# Altium PCB LightingDriver.PcbDoc (part 1 of 2)
Units mm, origin at the board's own origin, x right, y up, seen from the top; angles counter-clockwise.
Board outline 100 x 95 mm, 2 copper layers (Top Layer, Bottom Layer), stack 1.621 mm thick; 95 components, 49 nets, 284 pads, 147 vias.
Unrouted connection lines stored in the file: 4.
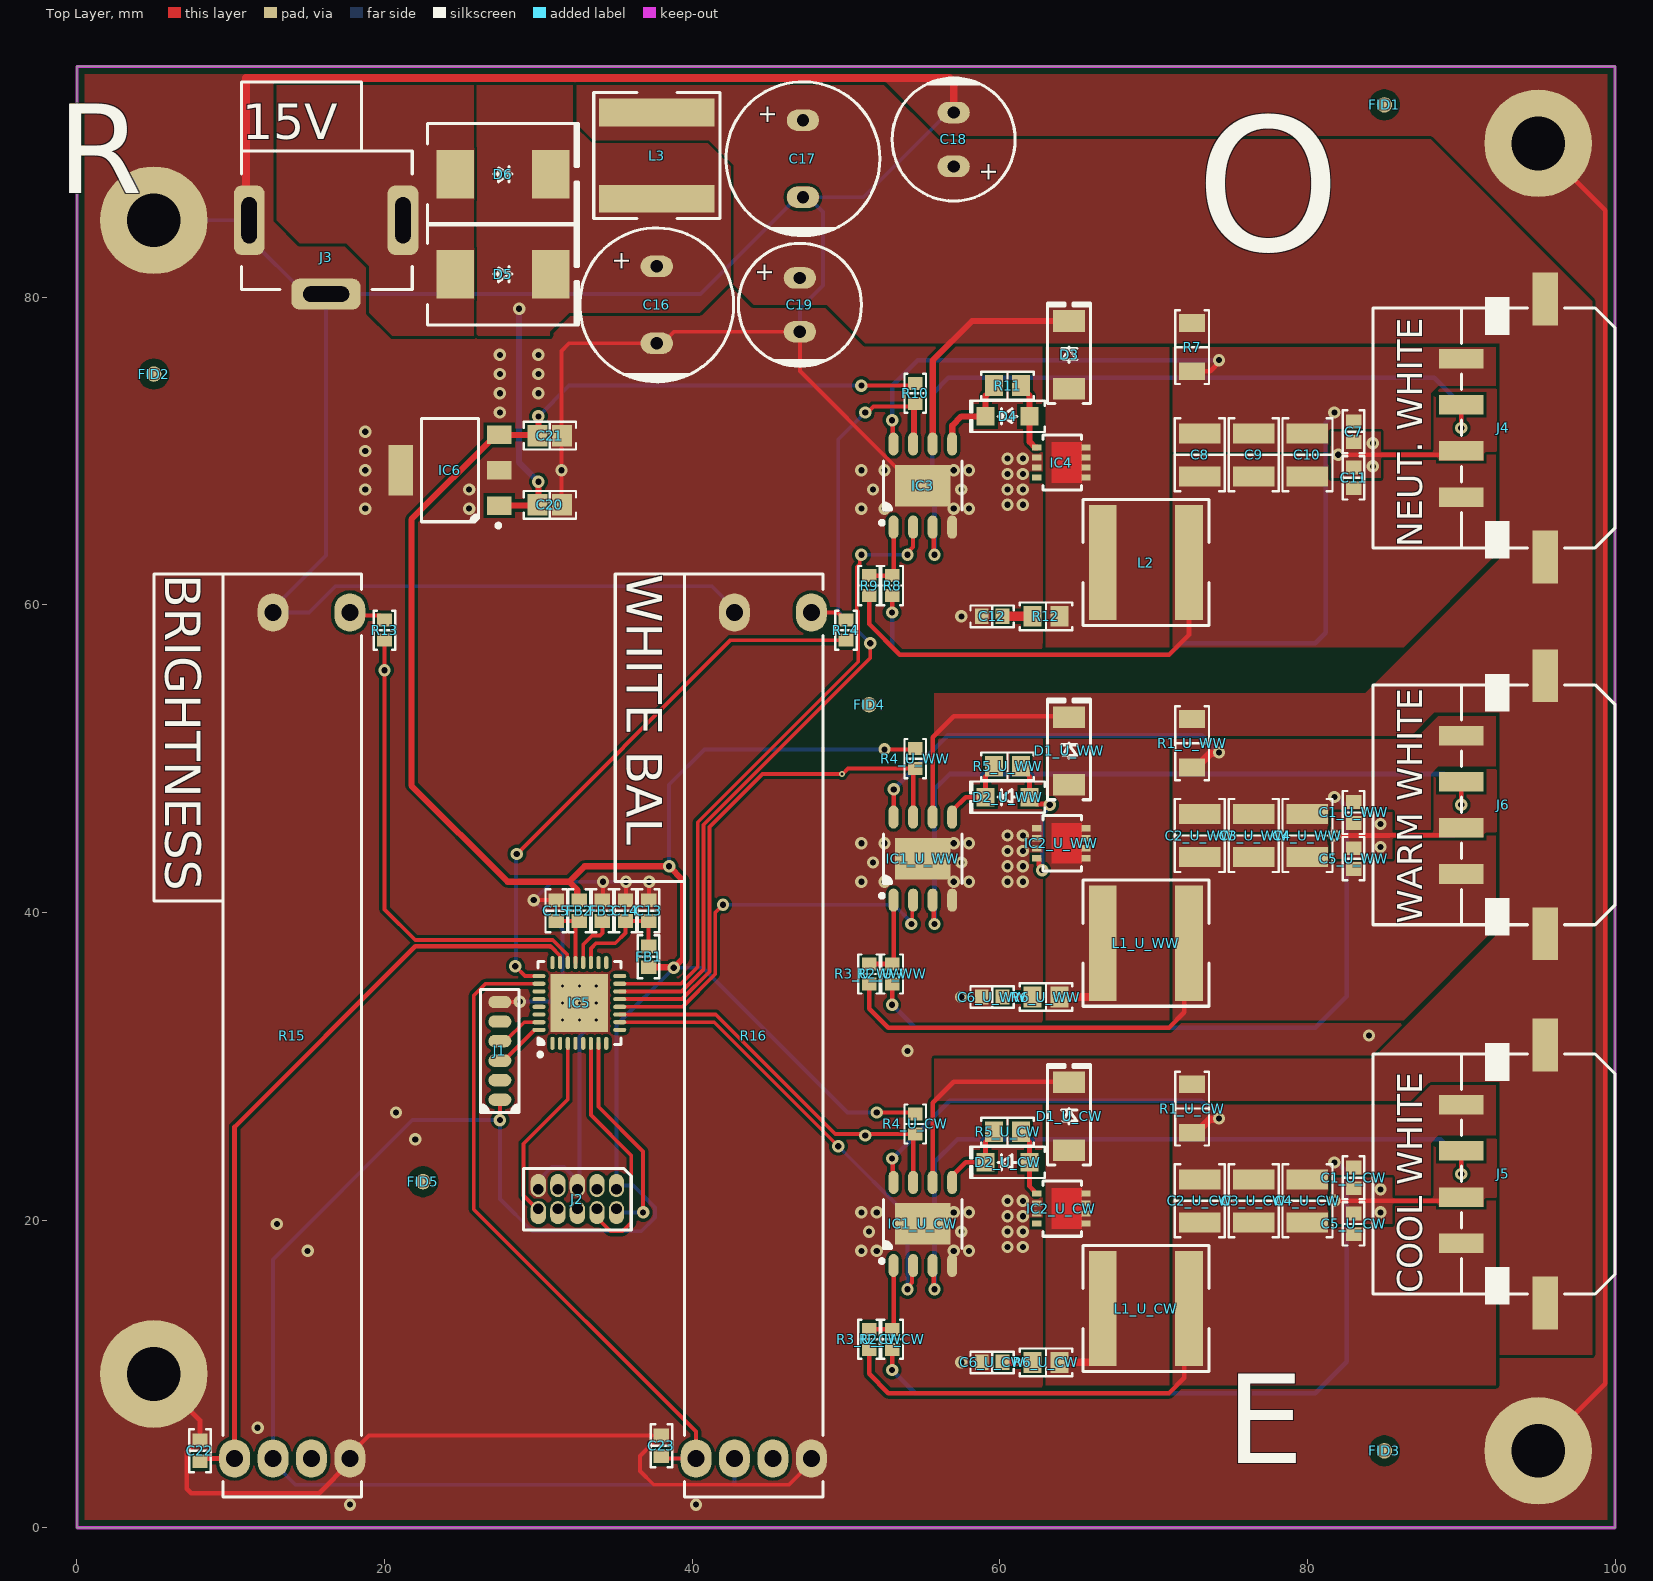
[diagram p0: Top Layer view]
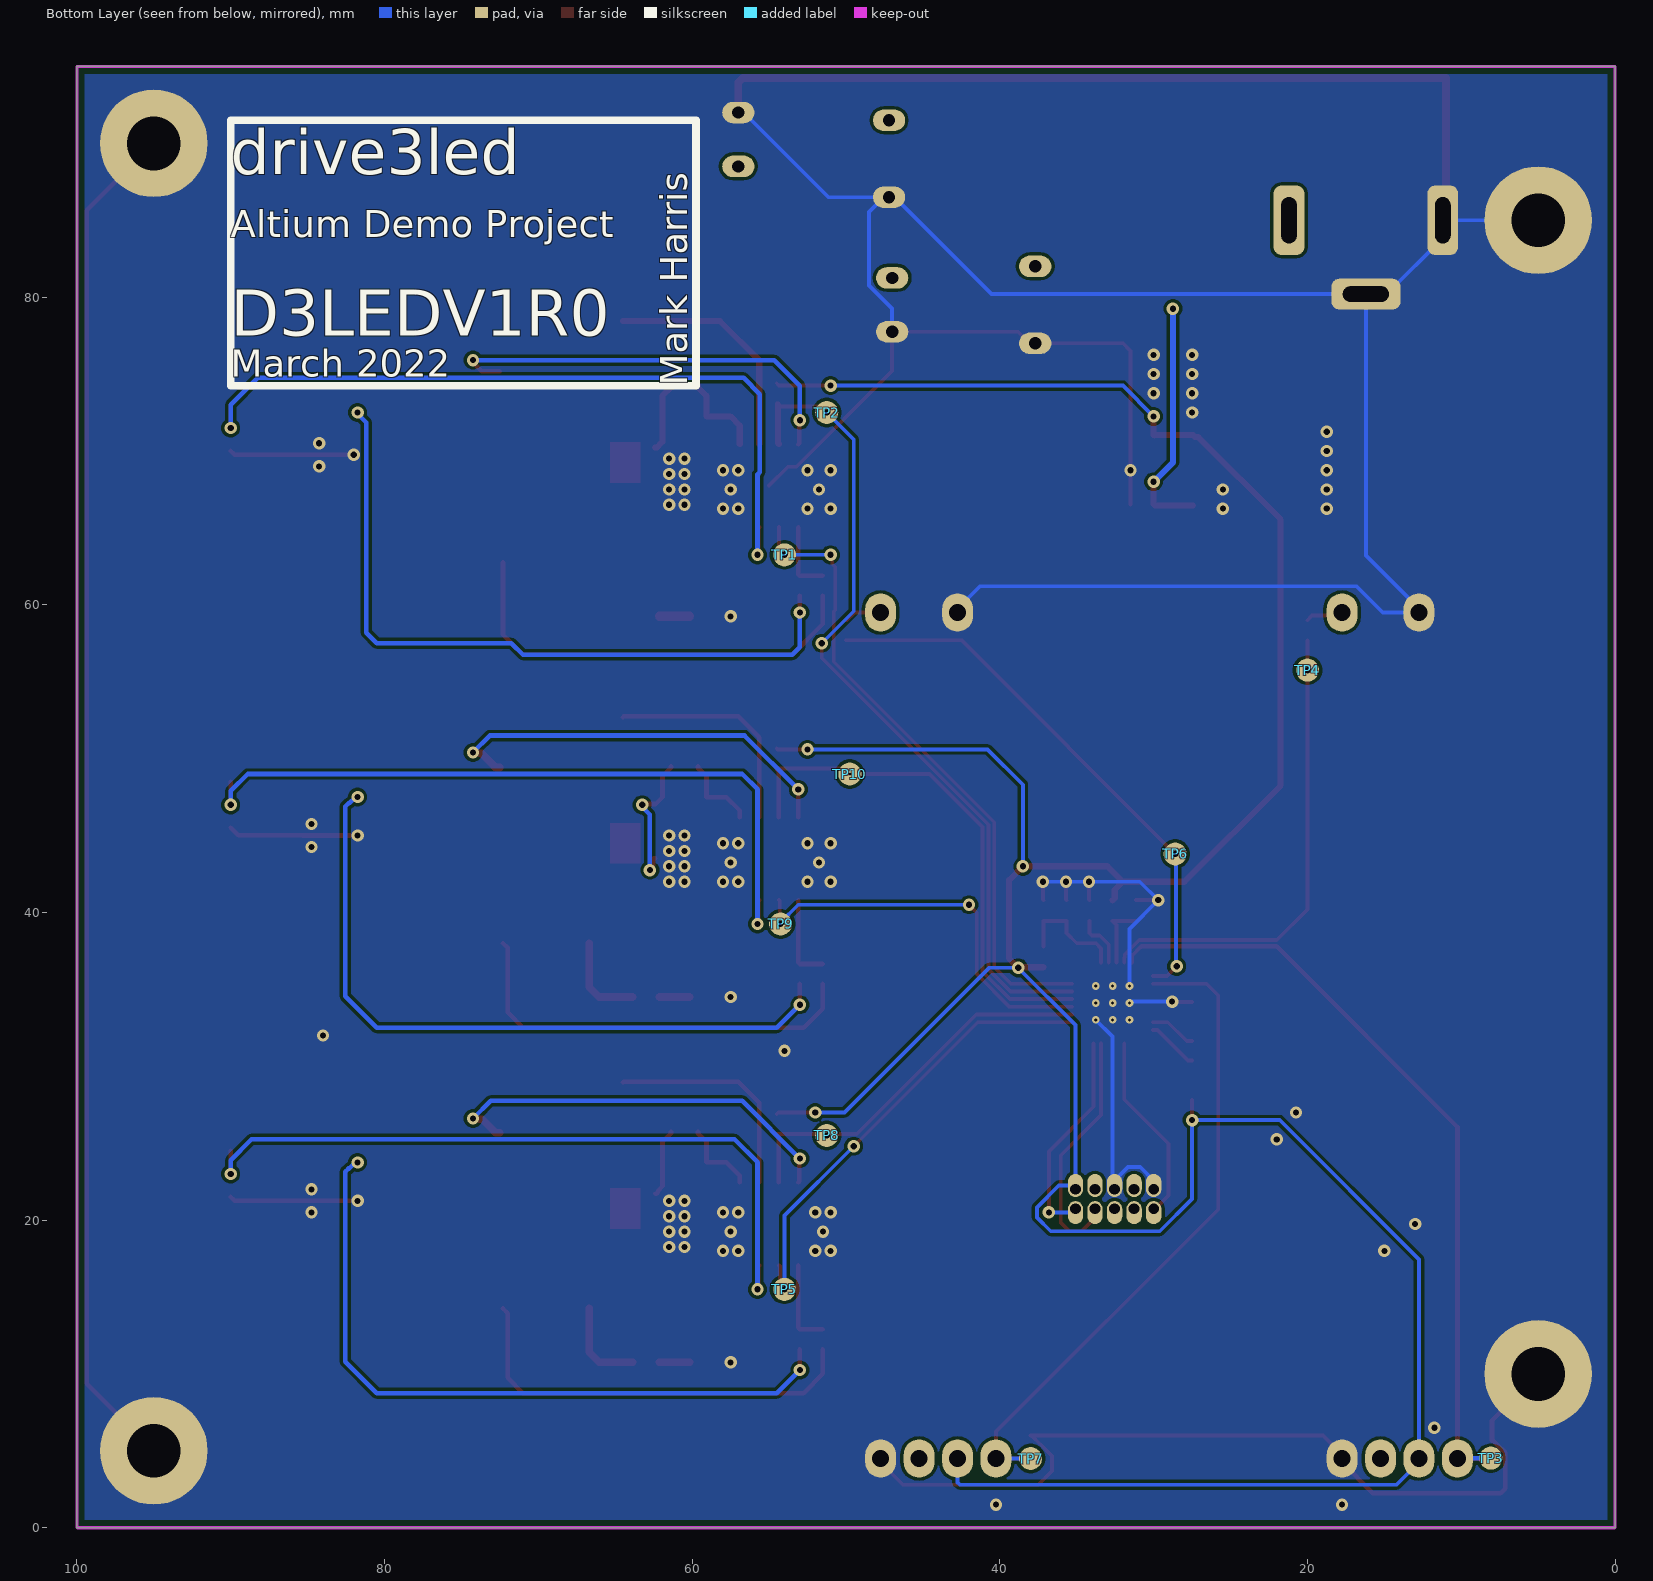
[diagram p1: Bottom Layer view, seen from below]
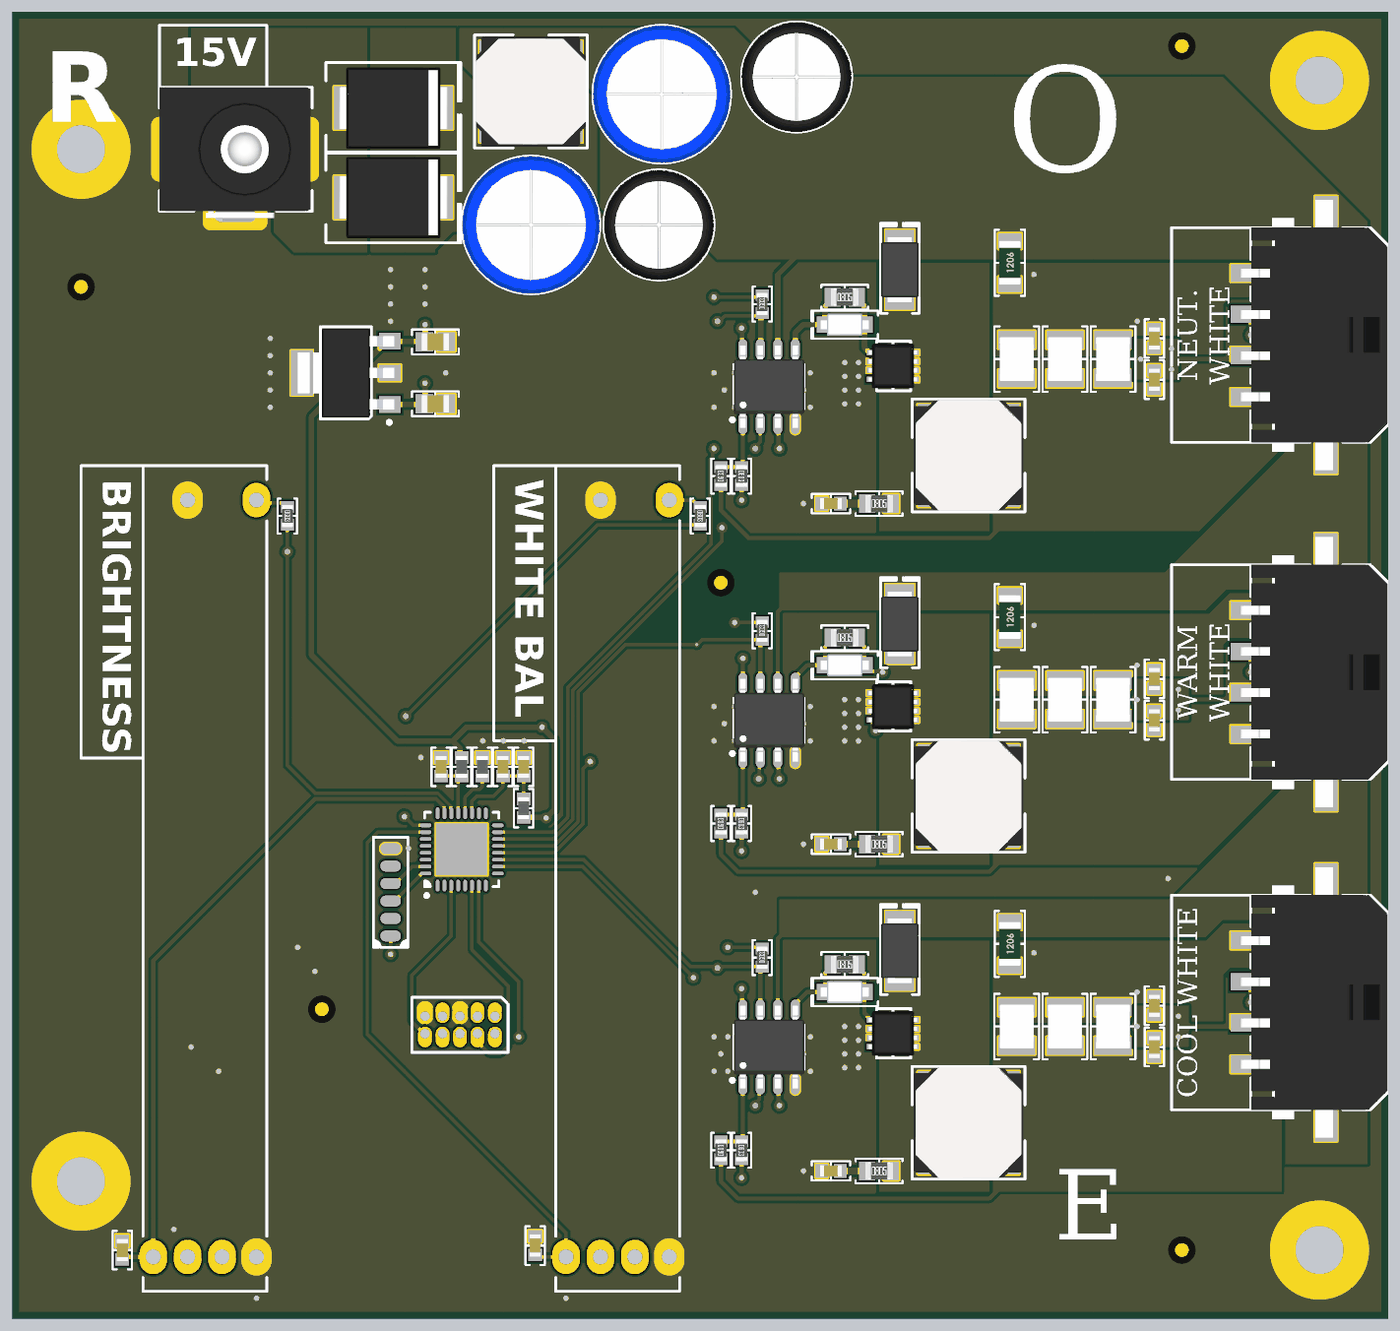
[diagram p2: 3D render of the assembled board from above, using the file's embedded part models]

## Layer stack, top to bottom
Top Solder: solder mask 0.0102, Solder Resist, Dk 3.5
Top Layer: signal copper 0.0356
Dielectric 1: dielectric 1.55, FR-4, Dk 4.8
Bottom Layer: signal copper 0.0356
Bottom Solder: solder mask 0.0102, Solder Resist, Dk 3.5

## Board outline
0,0 0,95 100,95 100,0

## Design rules (kind name [scope] priority, off if disabled: settings)
BoardOutlineClearance [All] p1: gap=0.5 ignorepadtopadclearanceinfootprint=FALSE
Clearance [All] p1: gap=0.2 ignorepadtopadclearanceinfootprint=FALSE except(0.13: Arc-Arc Arc-Track Track-Track SMDPad-SMDPad; 0.254: Arc-Via Arc-Hole Track-Via Track-Hole Via-Via Via-Hole; 0.33: Arc-THPad Track-THPad; 0.5: THPad-Via)
HoleSize [All] p1: absolutevalues=TRUE maxlimit=6.5 minlimit=0.2 maxpercent=80.000 minpercent=20.000
MinimumSolderMaskSliver [All] p1: minsoldermaskwidth=-10
PolygonConnect [All] p1: connectstyle=Direct reliefconductorwidth=0.254 reliefentries=4 polygonreliefangle="90 Angle" airgapwidth=0.254
RoomDefinition "Studio Lighting Driver" [InComponentClass('Studio Lighting Driver')] p1: confinementstyle=ConfineIn formatcopy=TRUE lockcomponents=FALSE outline 0,0 101,0 101,95 0,95
RoomDefinition U_CW [InComponentClass('U_CW')] p2: confinementstyle=ConfineIn formatcopy=TRUE lockcomponents=FALSE outline 50,8 88,8 88,31 50,31
RoomDefinition U_NW [InComponentClass('U_NW')] p3: confinementstyle=ConfineIn formatcopy=TRUE lockcomponents=FALSE outline 50,56 88,56 88,80 50,80
RoomDefinition U_WW [InComponentClass('U_WW')] p4: confinementstyle=ConfineIn formatcopy=TRUE lockcomponents=FALSE outline 50,32 88,32 88,55 50,55
RoomDefinition "U_Voltage Regulator" [InComponentClass('U_Voltage Regulator')] p5: confinementstyle=ConfineIn formatcopy=TRUE lockcomponents=FALSE outline 9.2,60.75 70.2,60.75 70.2,95.092 9.2,95.092
RoomDefinition U_Microcontroller [InComponentClass('U_Microcontroller')] p6: confinementstyle=ConfineIn formatcopy=TRUE lockcomponents=FALSE outline 39.54,11.34 39.54,43.865 19.299,43.865 19.299,11.34
RoomDefinition U_Inputs [InComponentClass('U_Inputs')] p7: confinementstyle=ConfineIn formatcopy=TRUE lockcomponents=FALSE outline 5,0 55,0 55,65 5,65
RoutingVias [All] p1: holewidth=6.3 width=0.8 viastyle="Through Hole" minholewidth=0.2 minwidth=0.4 maxholewidth=0.4 maxwidth=8
SilkToSilkClearance [All] p1: silktosilkclearance=-5
SilkToSolderMaskClearance [IsPad] p1: minsilkscreentomaskgap=-5 clearancetoexposedcopper=TRUE
SolderMaskExpansion "Via Tenting" [IsVia] p1: expansion=0.102 istentingtop=TRUE
SolderMaskExpansion [All] p2: expansion=0.102 istentingtop=FALSE
Width [All] p1: maxlimit=3 minlimit=0.13 preferedwidth=0.3
26 further rules are at their usual default settings.

## Classes and differential pairs
channel class "Low Current LED Driver": U_CW U_WW
component class U_WW: C1_U_WW C2_U_WW C3_U_WW C4_U_WW C5_U_WW C6_U_WW D1_U_WW D2_U_WW IC1_U_WW IC2_U_WW L1_U_WW R1_U_WW R2_U_WW R3_U_WW R4_U_WW R5_U_WW R6_U_WW
component class "U_Voltage Regulator": C16 C17 C18 C19 C20 C21 D5 D6 IC6 J3 L3
component class U_NW: C7 C8 C9 C10 C11 C12 D3 D4 IC3 IC4 L2 R7 R8 R9 R10 R11 R12
component class U_Microcontroller: C13 C14 C15 FB1 FB2 FB3 IC5 J1 J2
component class U_Inputs: C22 C23 R13 R14 R15 R16
component class U_CW: C1_U_CW C2_U_CW C3_U_CW C4_U_CW C5_U_CW C6_U_CW D1_U_CW D2_U_CW IC1_U_CW IC2_U_CW L1_U_CW R1_U_CW R2_U_CW R3_U_CW R4_U_CW R5_U_CW R6_U_CW
component class "Studio Lighting Driver": FID1 FID2 FID3 FID4 FID5 J4 J5 J6 TP1 TP2 TP3 TP4 TP5 TP6 TP7 TP8 TP9 TP10

## Components (designator, comment, footprint, x,y, rotation, side; value= is the part's Value field where it differs from the comment)
C1_U_CW "1500 pF" "CAP 0603_1608" 83,22.75 r90 top (schematic designator C1)
C1_U_WW "1500 pF" "CAP 0603_1608" 83,46.5 r90 top (schematic designator C1)
C2_U_CW "22 µF" "CAP 1210_3225 - 1MM" 73,21.25 r90 top (schematic designator C2)
C2_U_WW "22 µF" "CAP 1210_3225 - 1MM" 73,45 r90 top (schematic designator C2)
C3_U_CW "22 µF" "CAP 1210_3225 - 1MM" 76.5,21.25 r90 top (schematic designator C3)
C3_U_WW "22 µF" "CAP 1210_3225 - 1MM" 76.5,45 r90 top (schematic designator C3)
C4_U_CW "22 µF" "CAP 1210_3225 - 1MM" 80,21.25 r90 top (schematic designator C4)
C4_U_WW "22 µF" "CAP 1210_3225 - 1MM" 80,45 r90 top (schematic designator C4)
C5_U_CW "1500 pF" "CAP 0603_1608" 83,19.75 r270 top (schematic designator C5)
C5_U_WW "1500 pF" "CAP 0603_1608" 83,43.5 r270 top (schematic designator C5)
C6_U_CW "1000pF" "CAP 0603_1608" 59.5,10.75 r0 top (schematic designator C6)
C6_U_WW "1000pF" "CAP 0603_1608" 59.5,34.5 r0 top (schematic designator C6)
C7 "1500 pF" "CAP 0603_1608" 83,71.25 r90 top
C8 "22 µF" "CAP 1210_3225 - 1MM" 73,69.75 r90 top
C9 "22 µF" "CAP 1210_3225 - 1MM" 76.5,69.75 r90 top
C10 "22 µF" "CAP 1210_3225 - 1MM" 80,69.75 r90 top
C11 "1500 pF" "CAP 0603_1608" 83,68.25 r270 top
C12 "1000pF" "CAP 0603_1608" 59.5,59.25 r0 top
C13 "1 µF" "CAP 0603_1608" 37.165,40.115 r270 top
C14 "0.1 µF" "CAP 0603_1608" 35.665,40.115 r270 top
C15 "10000 pF" "CAP 0603_1608" 31.165,40.115 r270 top
C16 "270 µF" "CAP TH ALPOLY D10.00mm S5.00mm H14.00mm" 37.7,79.5 r90 top
C17 "270 µF" "CAP TH ALPOLY D10.00mm S5.00mm H14.00mm" 47.2,89 r90 top
C18 "330µF" "CAP TH ALUM ELEC D8.00mm S3.50mm H21.50mm" 57,90.25 r270 top
C19 "330µF" "CAP TH ALUM ELEC D8.00mm S3.50mm H21.50mm" 47,79.5 r90 top
C20 "4.7 µF" "CAP 0805_2012" 30.75,66.5 r180 top
C21 "4.7 µF" "CAP 0805_2012" 30.75,71 r180 top
C22 "0.1 µF" "CAP 0603_1608" 8,5 r270 top
C23 "0.1 µF" "CAP 0603_1608" 38,5.325 r270 top
D1_U_CW "PMEG3030EP,115" "NEXPERIA SOD-128 CFP5" 64.5,26.75 r90 top (schematic designator D1)
D1_U_WW "PMEG3030EP,115" "NEXPERIA SOD-128 CFP5" 64.5,50.5 r90 top (schematic designator D1)
D2_U_CW "PMEG3005EH,115" SOD123F 60.5,23.75 r180 top (schematic designator D2)
D2_U_WW "PMEG3005EH,115" SOD123F 60.5,47.5 r180 top (schematic designator D2)
D3 "PMEG3030EP,115" "NEXPERIA SOD-128 CFP5" 64.5,76.25 r90 top
D4 "PMEG3005EH,115" SOD123F 60.5,72.25 r180 top
D5 "SK44L-TP" "DO214AB SMC" 27.7,81.5 r0 top
D6 "SK44L-TP" "DO214AB SMC" 27.7,88 r0 top
FB1 "600 Ohms @ 100 MHz" "FER 0603_1608" 37.165,37.115 r90 top
FB2 "600 Ohms @ 100 MHz" "FER 0603_1608" 32.665,40.115 r270 top
FB3 "600 Ohms @ 100 MHz" "FER 0603_1608" 34.165,40.115 r270 top
FID1 "Fiducial" Fiducial-1mm 85,92.5 r90 top
FID2 "Fiducial" Fiducial-1mm 5,75 r90 top
FID3 "Fiducial" Fiducial-1mm 85,5 r90 top
FID4 "Fiducial" Fiducial-1mm 51.5,53.5 r90 top
FID5 "Fiducial" Fiducial-1mm 22.5,22.5 r90 top
IC1_U_CW "AL8863SP-13" "DIODES INC SO-8EP" 55,19.75 r90 top (schematic designator IC1)
IC1_U_WW "AL8863SP-13" "DIODES INC SO-8EP" 55,43.5 r90 top (schematic designator IC1)
IC2_U_CW "PXN018-30QLJ" "NEXPERIA MLPAK33 SOT8002-1" 64,20.75 r90 top (schematic designator IC2)
IC2_U_WW "PXN018-30QLJ" "NEXPERIA MLPAK33 SOT8002-1" 64,44.5 r90 top (schematic designator IC2)
IC3 "AL8863SP-13" "DIODES INC SO-8EP" 55,67.75 r90 top
IC4 "PXN018-30QLJ" "NEXPERIA MLPAK33 SOT8002-1" 64,69.25 r90 top
IC5 "LPC824M201JHI33Y" "NXP HVQFN-33 5X5MM" 32.665,34.115 r90 top
IC6 "AP2114HA-3.3TRG1" "DIODES SOT-223" 24.25,68.75 r180 top
J1 "SPI" "SPI Breakout" 27.5,31 r90 top
J2 "SWD" "10 Pin SWD" 32.54,21.365 r270 top
J3 "PJ-028BH" "CUI PJ-028BH" 16.2,85 r270 top
J4 "0436500412" "MOLEX 436500412" 95,71.5 r90 top
J5 "0436500412" "MOLEX 436500412" 95,23 r90 top
J6 "0436500412" "MOLEX 436500412" 95,47 r90 top
L1_U_CW "3.3 µH" "TAIYO YUDEN NRS8030" 69.5,14.25 r0 top (schematic designator L1)
L1_U_WW "3.3 µH" "TAIYO YUDEN NRS8030" 69.5,38 r0 top (schematic designator L1)
L2 "2.2 µH" "TAIYO YUDEN NRS8030" 69.5,62.75 r0 top
L3 "1 µH" "TAIYO YUDEN NRS8030" 37.7,89.2 r90 top
R1_U_CW "62 mOhms" "STACKPOLE CSR1206" 72.5,27.25 r90 top (schematic designator R1)
R1_U_WW "62 mOhms" "STACKPOLE CSR1206" 72.5,51 r90 top (schematic designator R1)
R2_U_CW "100 kOhms" "RES 0603_1608" 53,12.25 r270 top (schematic designator R2)
R2_U_WW "100 kOhms" "RES 0603_1608" 53,36 r270 top (schematic designator R2)
R3_U_CW "453 kOhms" "RES 0603_1608" 51.5,12.25 r90 top (schematic designator R3)
R3_U_WW "453 kOhms" "RES 0603_1608" 51.5,36 r90 top (schematic designator R3)
R4_U_CW "10 kOhms" "RES 0603_1608" 54.5,26.25 r90 top (schematic designator R4)
R4_U_WW "10 kOhms" "RES 0603_1608" 54.5,50 r90 top (schematic designator R4)
R5_U_CW "10 Ohms" "RES 0805_2012" 60.5,25.75 r0 top (schematic designator R5)
R5_U_WW "10 Ohms" "RES 0805_2012" 60.5,49.5 r0 top (schematic designator R5)
R6_U_CW "10 Ohms" "RES 0805_2012" 63,10.75 r0 top (schematic designator R6)
R6_U_WW "10 Ohms" "RES 0805_2012" 63,34.5 r0 top (schematic designator R6)
R7 "43 mOhms" "STACKPOLE CSR1206" 72.5,76.75 r90 top
R8 "100 kOhms" "RES 0603_1608" 53,61.25 r270 top
R9 "453 kOhms" "RES 0603_1608" 51.5,61.25 r90 top
R10 "10 kOhms" "RES 0603_1608" 54.5,73.75 r90 top
R11 "10 Ohms" "RES 0805_2012" 60.5,74.25 r0 top
R12 "10 Ohms" "RES 0805_2012" 63,59.25 r0 top
R13 "324 Ohms" "RES 0603_1608" 20,58.35 r270 top
R14 "324 Ohms" "RES 0603_1608" 50,58.35 r270 top
R15 "PTL45-15O0-104B1" "POT BOURNS PTL45-15xx" 14,32 r90 top
R16 "PTL45-15O0-104B1" "POT BOURNS PTL45-15xx" 44,32 r90 top
TP1 "Test Point" TestPoint-1.5mm 54,63.25 r180 bottom
TP2 "Test Point" TestPoint-1.5mm 51.25,72.5 r90 bottom
TP3 "Test Point" TestPoint-1.5mm 8.077,4.526 r90 bottom
TP4 "Test Point" TestPoint-1.5mm 20,55.75 r90 bottom
TP5 "Test Point" TestPoint-1.5mm 54,15.5 r90 bottom
TP6 "Test Point" TestPoint-1.5mm 28.6,43.8 r90 bottom
TP7 "Test Point" TestPoint-1.5mm 38,4.5 r90 bottom
TP8 "Test Point" TestPoint-1.5mm 51.25,25.5 r90 bottom
TP9 "Test Point" TestPoint-1.5mm 54.25,39.25 r90 bottom
TP10 "Test Point" TestPoint-1.5mm 49.75,49 r90 bottom

## Footprints (in the part's own frame and the unit in brackets; to place one, negate y for a bottom-side part, rotate by r counter-clockwise, add the part's x,y. Pads: shape width x height; smd on the part's side, far side on the other; paste and mask are expansions set on the pad)
"10 Pin SWD" [mm]
  oval 1.5x1 hole 0.7 copper offset -0.25,0: 1(-0.635,2.54) 3(-0.635,1.27) 5(-0.635,0) 7(-0.635,-1.27) 9(-0.635,-2.54)
  oval 1.5x1 hole 0.7 copper offset 0.25,0: 2(0.635,2.54) 4(0.635,1.27) 6(0.635,0) 8(0.635,-1.27) 10(0.635,-2.54)
  silkscreen extent -2,-3.5 2,3.5
"CAP 0603_1608" [mm] "Chip Capacitor, 2-Leads, Body 1.60x0.80mm, IPC Medium Density"
  rect 0.9x1 smd: 1(-0.675,0) 2(0.675,0)
  silkscreen extent -1.4,-0.7 1.4,0.7, body extent -0.8,-0.41 0.8,0.41, height 0.82
"CAP 0805_2012" [mm] "Chip Capacitor, 2-Leads, Body 2.00x1.20mm, IPC Medium Density"
  rect 1.3x1.4 smd: 1(-0.8,0) 2(0.8,0)
  silkscreen extent -1.7,-0.9 1.7,0.9, body extent -1,-0.64 1,0.64, height 1.26
"CAP 1210_3225 - 1MM" [mm] "Chip Capacitor, 2-Leads, Body 3.20x2.50mm, IPC Medium Density"
  rect 1.3x2.7 smd: 1(-1.4,0) 2(1.4,0)
  silkscreen extent -2.37,-1.63 2.37,1.63, body extent -1.6,-1.25 1.6,1.25, height 1
"CAP TH ALPOLY D10.00mm S5.00mm H14.00mm" [mm] "10.00mm Diameter 14.00mm Lead Spacing Aluminum - Polymer Capacitors Radial, Can"
  oval 1.4x2.1 hole 0.8: 1(2.5,0) 2(-2.5,0)
  silkscreen extent -5,-5 5,5, body extent -5.01,-5 5,5, height 14
"CAP TH ALUM ELEC D8.00mm S3.50mm H21.50mm" [mm] "8mm Diameter 3.5mm Lead Spacing Aluminum Electrolytic Capacitors Radial, Can"
  oval 1.4x2.1 hole 0.8: 1(1.75,0) 2(-1.75,0)
  silkscreen extent -4,-4 4,4, body extent -4.01,-4 4,4, height 21.5
"CUI PJ-028BH" [mm]
  rrect50% 4.5x2 hole 1 slot 3 at 0 deg: 1(0,5) 2(0,-5)
  rrect50% 2x4.5 hole 1 slot 3 at 90 deg: 3(4.8,0)
  silkscreen extent -4.5,-5.5 4.5,5.6, body extent -4.5,-5.5 5.53,5.66, height 19
"DIODES INC SO-8EP" [mm] "SOIC, 8-Leads, Body 4.90x3.90mm, Pitch 1.27mm, Thermal Pad 3.60x2.70mm, IPC Medium Density"
  oval 1.5x0.65 smd: 1(-2.7,1.905) 2(-2.7,0.635) 3(-2.7,-0.635) 4(-2.7,-1.905) 5(2.7,-1.905) 6(2.7,-0.635) 7(2.7,0.635) 8(2.7,1.905)
  rect 2.7x3.6 smd: 9(0,0)
  silkscreen extent -2.54,-2.55 1.6,2.79, body extent -3,-2.55 3,2.55, height 1.6
"DIODES SOT-223" [mm] "SOT223, 4-Leads, Body 6.50x7.00mm (avg), Pitch 2.30mm, IPC Medium Density"
  rect 1.6x1.2 smd: 1(-3.2,2.3) 2(-3.2,0) 3(-3.2,-2.3)
  rect 1.6x3.3 smd: 4(3.2,0)
  silkscreen extent -3.27,-3.35 1.85,3.72, body extent -3.52,-3.25 3.5,3.25, height 1.8
"DO214AB SMC" [mm] "Molded Diode, 2-Leads, Body 6.85x5.90mm, IPC Medium Density"
  rect 2.45x3.15 smd: 1(-3.1,0) 2(3.1,0)
  silkscreen extent -4.9,-3.3 4.9,3.3, body extent -3.97,-2.95 3.97,2.95, height 2.6
"FER 0603_1608" [mm] "Chip Ferrite, 2-Leads, Body 1.60x0.80mm, IPC Medium Density"
  rect 0.9x1 smd: 1(-0.675,0) 2(0.675,0)
  silkscreen extent -1.4,-0.7 1.4,0.7, body extent -0.8,-0.41 0.8,0.41, height 0.82
Fiducial-1mm [mm]
  round 1 smd paste-1 mask+0.5: F(0,0)
  Top Layer pour cut-out: -1,0 -0.924,0.383 -0.707,0.707 -0.383,0.924 0,1 0,1 0.383,0.924 0.707,0.707 0.924,0.383 1,0 1,0 0.924,-0.383 0.707,-0.707 0.383,-0.924 0,-1 0,-1 -0.383,-0.924 -0.707,-0.707 -0.924,-0.383 -1,0
"MOLEX 436500412" [mm]
  rect 1.27x2.92 smd: 1(4.5,5) 2(1.5,5) 3(-1.5,5) 4(-4.5,5)
  rect 3.43x1.65 smd: M(-8.385,-0.47) M(8.385,-0.47)
  silkscreen extent -8.5,-5 8.5,5, body extent -9.82,-4.95 9.82,5.79, height 5.68
"NEXPERIA MLPAK33 SOT8002-1" [mm]
  rect 0.4x0.6 smd: D(-0.975,-1.6) D(-0.325,-1.6) D(0.325,-1.6) D(0.975,-1.6) G(-0.975,1.6) S(-0.325,1.6) S(0.325,1.6) S(0.975,1.6)
  Top Layer region: 1.325,0.63 -1.325,0.63 -1.325,-1.35 1.325,-1.35
  silkscreen extent -1.8,-1.3 1.8,1.2, body extent -1.75,-1.75 1.75,1.75, height 0.9
"NEXPERIA SOD-128 CFP5" [mm] "SOD128, 2-Leads, Body 2.50x4.70mm, IPC Medium Density"
  rect 1.4x2.1 smd: 1(-2.2,0) 2(2.2,0)
  silkscreen extent -3.17,-1.4 3.37,1.4, body extent -2.35,-1.35 2.35,1.35, height 1.1
"NXP HVQFN-33 5X5MM" [mm] "QFN, 32-Leads, Body 5.00x5.00mm, Pitch 0.50mm, Thermal Pad 3.75x3.75mm, IPC Medium Density"
  oval 0.85x0.27 smd: 1(-2.625,1.75) 2(-2.625,1.25) 3(-2.625,0.75) 4(-2.625,0.25) 5(-2.625,-0.25) 6(-2.625,-0.75) 7(-2.625,-1.25) 8(-2.625,-1.75) 17(2.625,-1.75) 18(2.625,-1.25) 19(2.625,-0.75) 20(2.625,-0.25) 21(2.625,0.25) 22(2.625,0.75) 23(2.625,1.25) 24(2.625,1.75)
  oval 0.27x0.85 smd: 9(-1.75,-2.625) 10(-1.25,-2.625) 11(-0.75,-2.625) 12(-0.25,-2.625) 13(0.25,-2.625) 14(0.75,-2.625) 15(1.25,-2.625) 16(1.75,-2.625) 25(1.75,2.625) 26(1.25,2.625) 27(0.75,2.625) 28(0.25,2.625) 29(-0.25,2.625) 30(-0.75,2.625) 31(-1.25,2.625) 32(-1.75,2.625)
  rect 3.75x3.75 smd: 33(0,0)
  silkscreen extent -3.47,-2.7 2.7,2.7, body extent -2.55,-2.55 2.55,2.55, height 0.85
"POT BOURNS PTL45-15xx" [mm]
  oval 2.5x2 hole 1.1 unplated: 1(-27.5,1.25) 2(-27.5,3.75) 3(27.5,1.25) B(27.5,-3.75) E(-27.5,-3.75) L(-27.5,-1.25)
  silkscreen extent -30,-4.5 30,4.5, body extent -30,-4.5 30,4.5, height 21.95
"RES 0603_1608" [mm] "Chip Resistor, 2-Leads, Body 1.60x0.80mm, IPC Medium Density"
  rect 0.85x0.95 smd: 1(-0.65,0) 2(0.65,0)
  silkscreen extent -1.27,-0.7 1.27,0.7, body extent -0.8,-0.4 0.8,0.4, height 0.45
"RES 0805_2012" [mm] "Chip Resistor, 2-Leads, Body 2.00x1.25mm, IPC Medium Density"
  rect 1.15x1.35 smd: 1(-0.875,0) 2(0.875,0)
  silkscreen extent -1.7,-0.9 1.7,0.9, body extent -1,-0.62 1,0.63, height 0.6
SOD123F [mm] "SODFL, 2-Leads, Body 1.60x3.50mm, IPC Medium Density"
  rect 1.2x1.2 smd: 1(-1.43,0) 2(1.43,0)
  silkscreen extent -2.41,-1.02 2.41,1.02, body extent -1.75,-0.8 1.75,0.8, height 1.1
"SPI Breakout" [mm] "Flash Connection Point"
  oval 0.8x1.5 smd: 1(-3.175,0) 2(-1.905,0) 3(-0.635,0) 4(0.635,0) 5(1.905,0) 6(3.175,0)
  silkscreen extent -4,-1.25 4,1.25
"STACKPOLE CSR1206" [mm] "Chip Resistor, 2-Leads, Body 3.13x1.55mm, IPC Medium Density"
  rect 1.15x1.7 smd: 1(-1.575,0) 2(1.575,0)
  silkscreen extent -2.4,-1.1 2.4,1.1, body extent -1.6,-0.78 1.6,0.77, height 0.55
"TAIYO YUDEN NRS8030" [mm] "Precision Wire Wound Inductor, 2-Leads, Body 8.00x8.00mm, IPC Medium Density"
  rect 1.8x7.5 smd: 1(-2.8,0) 2(2.8,0)
  silkscreen extent -4.1,-4.1 4.1,4.1, body extent -4,-4 4,4, height 3
TestPoint-1.5mm [mm]
  round 1.5 smd: 1(0,0)

## Part data
C1_U_CW C1_U_WW C5_U_CW C5_U_WW C7 C11: library part 0603N152J500CT, "CAP CER 1500PF 50V C0G/NP0 0603", Device Package="0603 (1608 Metric)", manufacturer="Walsin Technology Corporation", Operating Temperature="-55°C ~ 125°C", Supplier Part Number 1=1292-1489-1-ND, Temperature Coefficient="C0G, NP0", Tolerance=±5%, Voltage - Rated=50V, Applications="General Purpose", Capacitance="1500 pF", componentlink1description=Datasheet, componentlink1url=http://www.passivecomponent.com/wp-content/uploads/2018/10/MLCC.pdf, componentlink2description="DigiKey Link", componentlink2url=https://www.digikey.com/en/products/detail/walsin-technology-corporation/0603N152J500CT/9354986, lastupdated="16/03/2022 06:22:23", Lifecycle Status=Active, Minimum Order=1, Mounting Type="Surface Mount, MLCC", Package / Case="0603 (1608 Metric)", packaging=TapeAndReel, Part Number=0603N152J500CT, Part Status=Active, partid=13065, price=0.01, series=-, Size / Dimension="0.063\" L x 0.031\" W (1.60mm x 0.80mm)", Supplier 1=DigiKey, Thickness (Max)="0.037\" (0.95mm)"
C2_U_CW C2_U_WW C3_U_CW C3_U_WW C4_U_CW C4_U_WW C8 C9 C10: library part CL32A226KAJNNNE, "CAP CER 22UF 25V X5R 1210", Device Package="1210 (3225 Metric)", manufacturer="Samsung Electro-Mechanics", Operating Temperature="-55°C ~ 85°C", Supplier Part Number 1=1276-1101-1-ND, Temperature Coefficient=X5R, Tolerance=±10%, Voltage - Rated=25V, Applications="General Purpose", Capacitance="22 µF", componentlink1description=Datasheet, componentlink1url=http://www.samsungsem.com/kr/support/product-search/mlcc/CL32A226KAJNNNE.jsp, componentlink2description="DigiKey Link", componentlink2url=https://www.digikey.com/en/products/detail/samsung-electro-mechanics/CL32A226KAJNNNE/3886759, lastupdated="16/03/2022 06:41:57", Lifecycle Status=Active, Minimum Order=1, Mounting Type="Surface Mount, MLCC", Package / Case="1210 (3225 Metric)", packaging=TapeAndReel, Part Number=CL32A226KAJNNNE, Part Status=Active, partid=39435, price=0.11, series=CL, Size / Dimension="0.126\" L x 0.098\" W (3.20mm x 2.50mm)", Supplier 1=DigiKey, Thickness (Max)="0.106\" (2.70mm)"
C6_U_CW C6_U_WW C12: library part 06035C102KAT2A, "CAP CER 1000PF 50V X7R 0603", Device Package="0603 (1608 Metric)", manufacturer="AVX Corporation", Operating Temperature="-55°C ~ 125°C", Supplier Part Number 1=478-1215-1-ND, Temperature Coefficient=X7R, Tolerance=±10%, Voltage - Rated=50V, Applications="General Purpose", Capacitance=1000pF, componentlink1description=Datasheet, componentlink1url=http://datasheets.avx.com/X7RDielectric.pdf, componentlink2description="DigiKey Link", componentlink2url=http://digikey.com/product-detail/en/avx-corporation/06035C102KAT2A/478-1215-1-ND/564247, lastupdated="02/09/2020 01:03:30", Lifecycle Status=Active, Minimum Order=1, Mounting Type="Surface Mount, MLCC", Package / Case="0603 (1608 Metric)", packaging=TapeAndReel, Part Number=06035C102KAT2A, Part Status=Active, partid=5544, price=0.01, series=-, Size / Dimension="0.063\" L x 0.032\" W (1.60mm x 0.81mm)", Supplier 1=DigiKey, Thickness (Max)="0.035\" (0.90mm)"
C13: library part CC0603KRX7R6BB105, "CAP CER 1UF 10V X7R 0603", Device Package="0603 (1608 Metric)", manufacturer=Yageo, Operating Temperature="-55°C ~ 125°C", Supplier Part Number 1=311-1796-1-ND, Temperature Coefficient=X7R, Tolerance=±10%, Voltage - Rated=10V, Applications="General Purpose", Capacitance="1 µF", componentlink1description=Datasheet, componentlink1url=https://www.yageo.com/upload/media/product/productsearch/datasheet/mlcc/UPY-GPHC_X7R_6.3V-to-50V_18.pdf, componentlink2description="DigiKey Link", componentlink2url=https://www.digikey.com/en/products/detail/yageo/CC0603KRX7R6BB105/5195204, lastupdated="16/03/2022 06:22:54", Lifecycle Status=Active, Minimum Order=1, Mounting Type="Surface Mount, MLCC", Package / Case="0603 (1608 Metric)", packaging=TapeAndReel, Part Number=CC0603KRX7R6BB105, Part Status=Active, partid=2290, price=0.02, series=CC, Size / Dimension="0.063\" L x 0.031\" W (1.60mm x 0.80mm)", Supplier 1=DigiKey, Thickness (Max)="0.035\" (0.90mm)"
C14 C22 C23: library part CC0603KRX7R6BB104, "CAP CER 0.1UF 10V X7R 0603", Device Package="0603 (1608 Metric)", manufacturer=Yageo, Operating Temperature="-55°C ~ 125°C", Supplier Part Number 1=311-4055-1-ND, Temperature Coefficient=X7R, Tolerance=±10%, Voltage - Rated=10V, Applications="General Purpose", Capacitance="0.1 µF", componentlink1description=Datasheet, componentlink1url=https://www.yageo.com/upload/media/product/productsearch/datasheet/mlcc/UPY-GPHC_X7R_6.3V-to-50V_18.pdf, componentlink2description="DigiKey Link", componentlink2url=https://www.digikey.com/en/products/detail/yageo/CC0603KRX7R6BB104/5883741, lastupdated="16/03/2022 06:22:39", Lifecycle Status=Active, Minimum Order=1, Mounting Type="Surface Mount, MLCC", Package / Case="0603 (1608 Metric)", packaging=TapeAndReel, Part Number=CC0603KRX7R6BB104, Part Status=Active, partid=7937, price=0.01, series=CC, Size / Dimension="0.063\" L x 0.031\" W (1.60mm x 0.80mm)", Supplier 1=DigiKey, Thickness (Max)="0.035\" (0.90mm)"
C15: library part CC0603KRX7R6BB103, "CAP CER 10000PF 10V X7R 0603", Device Package="0603 (1608 Metric)", manufacturer=Yageo, Operating Temperature="-55°C ~ 125°C", Supplier Part Number 1=311-4054-1-ND, Temperature Coefficient=X7R, Tolerance=±10%, Voltage - Rated=10V, Applications="General Purpose", Capacitance="10000 pF", componentlink1description=Datasheet, componentlink1url=https://www.yageo.com/upload/media/product/productsearch/datasheet/mlcc/UPY-GPHC_X7R_6.3V-to-50V_18.pdf, componentlink2description="DigiKey Link", componentlink2url=https://www.digikey.com/en/products/detail/yageo/CC0603KRX7R6BB103/5883740, lastupdated="16/03/2022 06:22:27", Lifecycle Status=Active, Minimum Order=1, Mounting Type="Surface Mount, MLCC", Package / Case="0603 (1608 Metric)", packaging=TapeAndReel, Part Number=CC0603KRX7R6BB103, Part Status=Active, partid=11852, price=0.01, series=CC, Size / Dimension="0.063\" L x 0.031\" W (1.60mm x 0.80mm)", Supplier 1=DigiKey, Thickness (Max)="0.035\" (0.90mm)"
C16 C17: library part A759MU277M1VAAE022, "CAP ALUM POLY 270UF 20% 35V TH", ESR (Equivalent Series Resistance)=22mOhm, Lifetime @ Temp.="2000 Hrs @ 125°C", manufacturer=KEMET, Operating Temperature="-55°C ~ 125°C", Ripple Current @ High Frequency="3.74 A @ 100 kHz", Ripple Current @ Low Frequency="187 mA @ 120 Hz", Supplier Part Number 1=399-A759MU277M1VAAE022-ND, Tolerance=±20%, Voltage - Rated="35 V", Applications="General Purpose", Capacitance="270 µF", componentlink1description=Datasheet, componentlink1url=https://api.kemet.com/component-edge/download/datasheet/A759MU277M1VAAE022.pdf, componentlink2description="DigiKey Link", componentlink2url=https://www.digikey.com/en/products/detail/kemet/A759MU277M1VAAE022/13420072, Height - Seated (Max)="0.551\" (14.00mm)", lastupdated="16/03/2022 07:18:21", Lead Spacing="0.197\" (5.00mm)", Lifecycle Status=Active, Minimum Order=1, Mounting Type="Through Hole", packaging=Bulk, Part Number=A759MU277M1VAAE022, Part Status=Active, partid=4518, price=0.26, series=A759, Size / Dimension="0.394\" Dia (10.00mm)", Supplier 1=DigiKey, Type=Polymer
C18 C19: library part 860080574014, "CAP ALUM 330UF 20% 35V THRU HOLE", Device Package="Radial, Can", Lifetime @ Temp.="3000 Hrs @ 105°C", manufacturer="Würth Elektronik", Operating Temperature="-55°C ~ 105°C", Ripple Current @ High Frequency="1.21A @ 100kHz", Supplier Part Number 1=732-9106-1-ND, Tolerance=±20%, Voltage - Rated=35V, Applications="General Purpose", Capacitance=330µF, componentlink1description=Datasheet, componentlink1url=https://katalog.we-online.de/pbs/datasheet/860080574014.pdf, componentlink2description="DigiKey Link", componentlink2url=http://digikey.com/product-detail/en/w-rth-elektronik/860080574014/732-9106-1-ND/5729049, Height - Seated (Max)="0.846\" (21.50mm)", Impedance="41 mOhms", lastupdated="08/09/2020 02:47:41", Lead Spacing="0.138\" (3.50mm)", Lifecycle Status=Active, Minimum Order=1, Mounting Type="Through Hole", Package / Case="Radial, Can", packaging=TapeAndBox, Part Number=860080574014, Part Status=Active, partid=24697, Polarization=Polar, price=0.29, series=WCAP-ATLI, Size / Dimension="0.315\" Dia (8.00mm)", Supplier 1=DigiKey
C20 C21: library part CL21A475KBQNNNE, "CAP CER 4.7UF 50V X5R 0805", Device Package="0805 (2012 Metric)", manufacturer="Samsung Electro-Mechanics", Operating Temperature="-55°C ~ 85°C", Supplier Part Number 1=1276-1248-1-ND, Temperature Coefficient=X5R, Tolerance=±10%, Voltage - Rated=50V, Applications="General Purpose", Capacitance="4.7 µF", componentlink1description=Datasheet, componentlink1url=http://www.samsungsem.com/kr/support/product-search/mlcc/CL21A475KBQNNNE.jsp, componentlink2description="DigiKey Link", componentlink2url=https://www.digikey.com/en/products/detail/samsung-electro-mechanics/CL21A475KBQNNNE/3886906, lastupdated="16/03/2022 06:26:03", Lifecycle Status=Active, Minimum Order=1, Mounting Type="Surface Mount, MLCC", Package / Case="0805 (2012 Metric)", packaging=TapeAndReel, Part Number=CL21A475KBQNNNE, Part Status=Active, partid=3027, price=0.04, series=CL, Size / Dimension="0.079\" L x 0.049\" W (2.00mm x 1.25mm)", Supplier 1=DigiKey, Thickness (Max)="0.055\" (1.40mm)"
D1_U_CW D1_U_WW D3: "DIODE SCHOTTKY 30V 3A CFP5", Capacitance @ Vr, F="470pF @ 1V, 1MHz", Current - Average Rectified (Io)=3A, Current - Reverse Leakage @ Vr="5 mA @ 30 V", manufacturer="Nexperia USA Inc.", Operating Temperature - Junction="150°C (Max)", Package / Case=SOD-128, Supplier Device Package=SOD-128/CFP5, Supplier Part Number 1=1727-5324-1-ND, Voltage - DC Reverse (Vr) (Max)="30 V", Voltage - Forward (Vf) (Max) @ If="360 mV @ 3 A", componentlink1description=Datasheet, componentlink1url=https://assets.nexperia.com/documents/data-sheet/PMEG3030EP.pdf, componentlink2description="DigiKey Link", componentlink2url=https://www.digikey.com/en/products/detail/nexperia-usa-inc/PMEG3030EP-115/2228693, Diode Type=Schottky, lastupdated="16/03/2022 11:28:51", Lifecycle Status=Active, Minimum Order=1, Mounting Type="Surface Mount", packaging=TapeAndReel, Part Number=PMEG3030EP,115, Part Status=Active, partid=3379, price=0.16, series=-, Speed="Fast Recovery =< 500ns, > 200mA (Io)", Supplier 1=DigiKey
D2_U_CW D2_U_WW D4: "DIODE SCHOTTKY 30V 500MA SOD123F", Capacitance @ Vr, F="70pF @ 1V, 1MHz", Current - Average Rectified (Io)="500mA (DC)", Current - Reverse Leakage @ Vr="150 µA @ 30 V", manufacturer="Nexperia USA Inc.", Operating Temperature - Junction="150°C (Max)", Package / Case=SOD-123F, Supplier Part Number 1=1727-3865-1-ND, Voltage - DC Reverse (Vr) (Max)="30 V", Voltage - Forward (Vf) (Max) @ If="430 mV @ 500 mA", componentlink1description=Datasheet, componentlink1url=https://assets.nexperia.com/documents/data-sheet/PMEGXX05EH_EJ_SER.pdf, componentlink2description="DigiKey Link", componentlink2url=https://www.digikey.com/en/products/detail/nexperia-usa-inc/PMEG3005EH-115/1157689, Diode Type=Schottky, lastupdated="16/03/2022 07:00:41", Lifecycle Status=Active, Minimum Order=1, Mounting Type="Surface Mount", packaging=TapeAndReel, Part Number=PMEG3005EH,115, Part Status=Active, partid=2471, price=0.05, series=-, Speed="Fast Recovery =< 500ns, > 200mA (Io)", Supplier 1=DigiKey, Supplier Device Package=SOD-123F
D5 D6: "DIODE SCHOTTKY 4A 40V SMC", Current - Average Rectified (Io)=4A, Current - Reverse Leakage @ Vr="500 µA @ 40 V", manufacturer="Micro Commercial Co", Operating Temperature - Junction="-55°C ~ 125°C", Package / Case="DO-214AB, SMC", Supplier Device Package="SMC (DO-214AB)", Supplier Part Number 1=SK44L-TPMSCT-ND, Voltage - DC Reverse (Vr) (Max)="40 V", Voltage - Forward (Vf) (Max) @ If="450 mV @ 4 A", componentlink1description=Datasheet, componentlink1url=https://www.mccsemi.com/pdf/Products/SK42L-SK44L(DO-214AB).pdf, componentlink2description="DigiKey Link", componentlink2url=https://www.digikey.com/en/products/detail/micro-commercial-co/SK44L-TP/5418832, Diode Type=Schottky, lastupdated="17/03/2022 08:59:56", Lifecycle Status=Active, Minimum Order=1, Mounting Type="Surface Mount", packaging=TapeAndReel, Part Number=SK44L-TP, Part Status=Active, partid=1693, price=0.15, series=-, Speed="Fast Recovery =< 500ns, > 200mA (Io)", Supplier 1=DigiKey
FB1 FB2 FB3: library part 2506036017Y2, "MULTI-LAYER CHIP BEAD", Current Rating (Max)=2A, DC Resistance (DCR) (Max)=120mOhm, Device Package="0603 (1608 Metric)", manufacturer="Fair-Rite Products Corp.", Operating Temperature="-55°C ~ 125°C", Supplier Part Number 1=1934-2506036017Y2CT-ND, componentlink1description=Datasheet, componentlink1url=https://www.fair-rite.com/wp-content/themes/fair-rite/print_product.php?pid=29757, componentlink2description="DigiKey Link", componentlink2url=https://www.digikey.com/en/products/detail/fair-rite-products-corp/2506036017Y2/14635285, Filter Type="Signal Line", Height (Max)="0.037\" (0.95mm)", Impedance @ Frequency="600 Ohms @ 100 MHz", lastupdated="21/03/2022 18:53:23", Lifecycle Status=Active, Minimum Order=1, Mounting Type="Surface Mount", Number of Lines=1, Package / Case="0603 (1608 Metric)", packaging=TapeAndReel, Part Number=2506036017Y2, Part Status=Active, partid=2657, price=0.03, series=-, Size / Dimension="0.063\" L x 0.031\" W (1.60mm x 0.80mm)", Supplier 1=DigiKey
IC1_U_CW IC1_U_WW IC3: "LED MV INT SWITCH SO-8EP", Frequency="50kHz ~ 1MHz", manufacturer="Diodes Incorporated", Operating Temperature="-40°C ~ 125°C (TA)", Package / Case="8-SOIC (0.154\", 3.90mm Width) Exposed Pad", Supplier Device Package=8-SO-EP, Supplier Part Number 1=31-AL8863SP-13CT-ND, Voltage - Supply (Max)=60V, Voltage - Supply (Min)=4.5V, Applications="Commercial & Industrial Lighting", componentlink1description=Datasheet, componentlink1url=https://www.diodes.com/assets/Datasheets/AL8863.pdf, componentlink2description="DigiKey Link", componentlink2url=https://www.digikey.com/en/products/detail/diodes-incorporated/AL8863SP-13/10481155, Dimming=PWM, Internal Switch(s)=No, lastupdated="16/03/2022 13:00:06", Lifecycle Status=Active, Minimum Order=1, Mounting Type="Surface Mount", Number of Outputs=1, packaging=TapeAndReel, Part Number=AL8863SP-13, Part Status=Active, partid=9, price=0.23, series=-, Supplier 1=DigiKey, Topology="Step-Down (Buck)", Type="DC DC Controller"
IC2_U_CW IC2_U_WW IC4: "PXN018-30QL/SOT8002/MLPAK33", Current - Continuous Drain (Id) @ 25°C="7.5A (Ta), 19.2A (Tc)", Drain to Source Voltage (Vdss)="30 V", Drive Voltage (Max Rds On,  Min Rds On)="4.5V, 10V", Input Capacitance (Ciss) (Max) @ Vds="447 pF @ 15 V", manufacturer="Nexperia USA Inc.", Operating Temperature="-55°C ~ 150°C (TJ)", Power Dissipation (Max)="1.7W (Ta), 10.9W (Tc)", Supplier Device Package=MLPAK33, Supplier Part Number 1=1727-PXN018-30QLJCT-ND, componentlink1description=Datasheet, componentlink1url=https://assets.nexperia.com/documents/data-sheet/PXN018-30QL.pdf, componentlink2description="DigiKey Link", componentlink2url=https://www.digikey.com/en/products/detail/nexperia-usa-inc/PXN018-30QLJ/13690066, FET Type=N-Channel, Gate Charge (Qg) (Max) @ Vgs="10.8 nC @ 10 V", lastupdated="16/03/2022 13:32:54", Lifecycle Status=Active, Minimum Order=1, Mounting Type="Surface Mount", packaging=TapeAndReel, Part Number=PXN018-30QLJ, Part Status=Active, price=0.18, Rds On (Max) @ Id, Vgs="18mOhm @ 7.5A, 10V", series=-, Supplier 1=DigiKey, Technology="MOSFET (Metal Oxide)", Vgs (Max)=±20V, Vgs(th) (Max) @ Id="2.5V @ 250µA"
IC5: "IC MCU 32BIT 32KB FLASH 32HVQFN", Device Package="32-VFQFN Exposed Pad", manufacturer="NXP USA Inc.", Operating Temperature="-40°C ~ 105°C (TA)", Supplier Device Package="32-HVQFN (5x5)", Supplier Part Number 1=568-13786-2-ND, Voltage - Supply (Vcc/Vdd)="1.8V ~ 3.6V", componentlink1description=Datasheet, componentlink1url=https://www.nxp.com/docs/en/data-sheet/LPC82X.pdf, componentlink2description="DigiKey Link", componentlink2url=//digikey.com/product-detail/en/nxp-usa-inc/LPC824M201JHI33Y/568-13786-2-ND/5170008, Connectivity="I²C, SPI, UART/USART", Core Processor="ARM® Cortex®-M0+", Core Size=32-Bit, Data Converters="A/D 12x12b", lastupdated="03/12/2019 17:42:55", Lifecycle Status=0, Minimum Order=1, Mounting Type="Surface Mount", Number of I/O=29, Oscillator Type=Internal, Package / Case="32-VFQFN Exposed Pad", packaging=TapeAndReel, Part Number=LPC824M201JHI33Y, Part Status=Active, partid=38, Peripherals="Brown-out Detect/Reset, DMA, POR, PWM, WDT", price=0.85, Program Memory Size="32KB (32K x 8)", Program Memory Type=FLASH, RAM Size="8K x 8", series=LPC82x, Speed=30MHz, Supplier 1=DigiKey
IC6: "IC REG LINEAR 3.3V 1A SOT223", Current - Output=1A, Current - Quiescent (Iq)="90 µA", manufacturer="Diodes Incorporated", Operating Temperature="-40°C ~ 85°C", Package / Case="TO-261-4, TO-261AA", Supplier Device Package=SOT-223-3, Supplier Part Number 1=AP2114HA-3.3TRG1DICT-ND, Voltage - Input (Max)=6V, Voltage - Output (Min/Fixed)=3.3V, Voltage Dropout (Max)="0.75V @ 1A", componentlink1description=Datasheet, componentlink1url=https://www.diodes.com/assets/Datasheets/AP2114.pdf, componentlink2description="DigiKey Link", componentlink2url=https://www.digikey.com/en/products/detail/diodes-incorporated/AP2114HA-3-3TRG1/4770627, lastupdated="12/04/2022 23:08:40", Lifecycle Status=Active, Minimum Order=1, Mounting Type="Surface Mount", Number of Regulators=1, Output Configuration=Positive, Output Type=Fixed, packaging=TapeAndReel, Part Number=AP2114HA-3.3TRG1, Part Status=Active, price=0.10, Protection Features="Over Current, Over Temperature", PSRR="65dB (100Hz ~ 1kHz)", series=-, Supplier 1=DigiKey
J3: "CONN POWER JACK 2.5X5.5MM", Current Rating (Amps)="5 A", manufacturer="CUI Devices", Material Flammability Rating="UL94 V-0", Supplier Part Number 1=CP-028BH-ND, Actual Diameter="0.098\" (2.50mm ID), 0.256\" (6.50mm OD)", componentlink1description=Datasheet, componentlink1url=https://www.cuidevices.com/product/resource/digikeypdf/pj-028bh.pdf, componentlink2description="DigiKey Link", componentlink2url=https://www.digikey.com/en/products/detail/cui-devices/PJ-028BH/1644512, Connector Type=Jack, Gender=Male, Industry Recognized Mating Diameter="2.50mm ID (0.098\"), 5.50mm OD (0.217\")", Internal Switch(s)="Single Switch, Normally Closed", lastupdated="19/03/2022 04:09:31", Lifecycle Status=Active, Mating Length/Depth="0.354\" (9.00mm)", Minimum Order=1, Mounting Type="Through Hole", Number of Positions/Contacts="2 Conductors, 3 Contacts", packaging=Bag, Part Number=PJ-028BH, Part Status=Active, price=0.56, series=-, Shielding=Unshielded, Supplier 1=DigiKey, Termination="Kinked Pin"
J4 J5 J6: "CONN HEADER SMD R/A 4POS 3MM", Insulation Color=Black, manufacturer=Molex, Material Flammability Rating="UL94 V-0", Supplier Part Number 1=WM1892CT-ND, componentlink1description=Datasheet, componentlink1url=https://www.molex.com/pdm_docs/sd/436500412_sd.pdf, componentlink2description="DigiKey Link", componentlink2url=https://www.digikey.com/en/products/detail/molex/0436500412/3451041, Connector Type=Header, Contact Finish - Mating=Tin, Contact Finish - Post=Tin, Contact Finish Thickness - Mating="60.0µin (1.52µm)", Contact Material=Brass, Contact Shape=Square, Contact Type="Male Pin", Fastening Type="Locking Ramp", Features="Solder Retention", Insulation Height="0.172\" (4.37mm)", Insulation Material="Liquid Crystal Polymer (LCP), Glass Filled", lastupdated="21/03/2022 20:35:03", Lifecycle Status=Active, Minimum Order=1, Mounting Type="Surface Mount, Right Angle", Number of Positions=4, Number of Positions Loaded=All, Number of Rows=1, packaging=TapeAndReel, Part Number=0436500412, Part Status=Active, partid=134, Pitch - Mating="0.118\" (3.00mm)", price=1.64, series="Micro-Fit 3.0 43650", Shrouding="Shrouded - 4 Wall", Style="Board to Cable/Wire", Supplier 1=DigiKey, Termination=Solder
L1_U_CW L1_U_WW: library part NRS8030T3R3MJGJ, "FIXED IND 3.3UH 4.3A 19 MOHM SMD", Current - Saturation=4.2A, Current Rating (Amps)="4.3 A", DC Resistance (DCR)=19mOhm, Device Package=Nonstandard, Frequency - Self Resonant=50MHz, Inductance Frequency - Test="100 kHz", manufacturer="Taiyo Yuden", Operating Temperature="-25°C ~ 125°C", Supplier Part Number 1=587-2967-1-ND, Tolerance=±20%, componentlink1description=Datasheet, componentlink1url=https://www.yuden.co.jp/productdata/catalog/wound04_e.pdf, componentlink2description="DigiKey Link", componentlink2url=https://www.digikey.com/en/products/detail/taiyo-yuden/NRS8030T3R3MJGJ/2666005, Height - Seated (Max)="0.118\" (3.00mm)", Inductance="3.3 µH", lastupdated="16/03/2022 11:26:54", Lifecycle Status=Active, Material - Core=Ferrite, Minimum Order=1, Mounting Type="Surface Mount", Package / Case=Nonstandard, packaging=TapeAndReel, Part Number=NRS8030T3R3MJGJ, Part Status=Active, partid=5492, price=0.21, series="NR, S Type", Shielding=Shielded, Size / Dimension="0.315\" L x 0.315\" W (8.00mm x 8.00mm)", Supplier 1=DigiKey, Type=Wirewound
L2: library part NRS8030T2R2NJGJ, "FIXED IND 2.2UH 4.8A 19.5MOHM SM", Current - Saturation=4.9A, Current Rating (Amps)="4.8 A", DC Resistance (DCR)="19.5mOhm Max", Device Package=Nonstandard, Frequency - Self Resonant=60MHz, Inductance Frequency - Test="100 kHz", manufacturer="Taiyo Yuden", Operating Temperature="-25°C ~ 125°C", Supplier Part Number 1=587-2965-1-ND, Tolerance=±30%, componentlink1description=Datasheet, componentlink1url=https://www.yuden.co.jp/productdata/catalog/wound04_e.pdf, componentlink2description="DigiKey Link", componentlink2url=https://www.digikey.com/en/products/detail/taiyo-yuden/NRS8030T2R2NJGJ/2666003, Height - Seated (Max)="0.118\" (3.00mm)", Inductance="2.2 µH", lastupdated="16/03/2022 13:29:46", Lifecycle Status=Active, Material - Core=Ferrite, Minimum Order=1, Mounting Type="Surface Mount", Package / Case=Nonstandard, packaging=TapeAndReel, Part Number=NRS8030T2R2NJGJ, Part Status=Active, partid=5494, price=0.21, series="NR, S Type", Shielding=Shielded, Size / Dimension="0.315\" L x 0.315\" W (8.00mm x 8.00mm)", Supplier 1=DigiKey, Type=Wirewound
L3: library part NRS8030T1R0NJGJ, "FIXED IND 1UH 6.2A 11.7 MOHM SMD", Current - Saturation=7.8A, Current Rating (Amps)="6.2 A", DC Resistance (DCR)="11.7mOhm Max", Device Package=Nonstandard, Frequency - Self Resonant=120MHz, Inductance Frequency - Test="100 kHz", manufacturer="Taiyo Yuden", Operating Temperature="-25°C ~ 125°C", Supplier Part Number 1=587-2962-1-ND, Tolerance=±30%, componentlink1description=Datasheet, componentlink1url=https://www.yuden.co.jp/productdata/catalog/wound04_e.pdf, componentlink2description="DigiKey Link", componentlink2url=https://www.digikey.com/en/products/detail/taiyo-yuden/NRS8030T1R0NJGJ/2666000, Height - Seated (Max)="0.118\" (3.00mm)", Inductance="1 µH", lastupdated="16/03/2022 13:29:43", Lifecycle Status=Active, Material - Core=Ferrite, Minimum Order=1, Mounting Type="Surface Mount", Package / Case=Nonstandard, packaging=TapeAndReel, Part Number=NRS8030T1R0NJGJ, Part Status=Active, partid=5484, price=0.21, series="NR, S Type", Shielding=Shielded, Size / Dimension="0.315\" L x 0.315\" W (8.00mm x 8.00mm)", Supplier 1=DigiKey, Type=Wirewound
R1_U_CW R1_U_WW: library part RLP73N2BR062FTDF, "RES 0.062 OHM 1% 1/2W 1206", Device Package="1206 (3216 Metric)", manufacturer="TE Connectivity Passive Product", Operating Temperature="-55°C ~ 155°C", Power (Watts)="0.5W, 1/2W", Supplier Device Package=1206, Supplier Part Number 1=A109640CT-ND, Temperature Coefficient=±300ppm/°C, Tolerance=±1%, componentlink1description=Datasheet, componentlink1url=https://www.te.com/commerce/DocumentDelivery/DDEController?Action=srchrtrv&DocNm=1773269&DocType=DS&DocLang=English, componentlink2description="DigiKey Link", componentlink2url=http://digikey.com/product-detail/en/te-connectivity-passive-product/RLP73N2BR062FTDF/A109640CT-ND/4032406, Composition="Thick Film", Features="Current Sense", Height - Seated (Max)="0.026\" (0.65mm)", lastupdated="16/03/2022 06:58:00", Lifecycle Status=Active, Minimum Order=1, Number of Terminations=2, Package / Case="1206 (3216 Metric)", packaging=TapeAndReel, Part Number=RLP73N2BR062FTDF, Part Status=Active, partid=2646, price=0.14, Resistance="62 mOhms", series="RL73, CGS", Size / Dimension="0.122\" L x 0.061\" W (3.10mm x 1.55mm)", Supplier 1=DigiKey
R2_U_CW R2_U_WW R8: library part CRCW0603100KFKEAC, "RES 100K OHM 1% 1/10W 0603", Device Package="0603 (1608 Metric)", manufacturer="Vishay Dale", Operating Temperature="-55°C ~ 155°C", Power (Watts)="0.1W, 1/10W", Supplier Device Package=0603, Supplier Part Number 1=541-3950-1-ND, Temperature Coefficient=±100ppm/°C, Tolerance=±1%, componentlink1description=Datasheet, componentlink1url=http://www.vishay.com/docs/28773/crcwce3.pdf, componentlink2description="DigiKey Link", componentlink2url=https://www.digikey.com/en/products/detail/vishay-dale/CRCW0603100KFKEAC/7928372, Composition="Thick Film", Height - Seated (Max)="0.022\" (0.55mm)", lastupdated="16/03/2022 06:41:03", Lifecycle Status=Active, Minimum Order=1, Number of Terminations=2, Package / Case="0603 (1608 Metric)", packaging=CutTape, Part Number=CRCW0603100KFKEAC, Part Status=Active, partid=12549, price=0.01, Resistance="100 kOhms", series=CRCW-C, Supplier 1=DigiKey
R3_U_CW R3_U_WW R9: library part RMCF0603FT453K, "RES 453K OHM 1% 1/10W 0603", Device Package="0603 (1608 Metric)", manufacturer="Stackpole Electronics Inc", Operating Temperature="-55°C ~ 155°C", Power (Watts)="0.1W, 1/10W", Ratings=AEC-Q200, Supplier Device Package=0603, Supplier Part Number 1=RMCF0603FT453KCT-ND, Temperature Coefficient=±100ppm/°C, Tolerance=±1%, componentlink1description=Datasheet, componentlink1url=https://www.seielect.com/catalog/sei-rmcf_rmcp.pdf, componentlink2description="DigiKey Link", componentlink2url=https://www.digikey.com/en/products/detail/stackpole-electronics-inc/RMCF0603FT453K/1761122, Composition="Thick Film", Features="Automotive AEC-Q200", Height - Seated (Max)="0.022\" (0.55mm)", lastupdated="16/03/2022 06:40:25", Lifecycle Status=Active, Minimum Order=1, Number of Terminations=2, Package / Case="0603 (1608 Metric)", packaging=CutTape, Part Number=RMCF0603FT453K, Part Status=Active, partid=22558, price=0.01, Resistance="453 kOhms", series=RMCF, Size / Dimension="0.061\" L x 0.031\" W (1.55mm x 0.80mm)", Supplier 1=DigiKey
R4_U_CW R4_U_WW R10: library part ERJ-3GEYJ103V, "RES SMD 10K OHM 5% 1/10W 0603", Device Package="0603 (1608 Metric)", manufacturer="Panasonic Electronic Components", Operating Temperature="-55°C ~ 155°C", Power (Watts)="0.1W, 1/10W", Ratings=AEC-Q200, Supplier Device Package=0603, Supplier Part Number 1=P10KGCT-ND, Temperature Coefficient=±200ppm/°C, Tolerance=±5%, componentlink1description=Datasheet, componentlink1url=http://industrial.panasonic.com/www-cgi/jvcr13pz.cgi?E+PZ+3+AOA0001+ERJ3GEYJ103V+7+WW, componentlink2description="DigiKey Link", componentlink2url=https://www.digikey.com/en/products/detail/panasonic-electronic-components/ERJ-3GEYJ103V/135662, Composition="Thick Film", Features="Automotive AEC-Q200", Height - Seated (Max)="0.022\" (0.55mm)", lastupdated="16/03/2022 06:40:24", Lifecycle Status=Active, Minimum Order=1, Number of Terminations=2, Package / Case="0603 (1608 Metric)", packaging=TapeAndReel, Part Number=ERJ-3GEYJ103V, Part Status=Active, partid=22604, price=0.01, Resistance="10 kOhms", series=ERJ-3G, Size / Dimension="0.063\" L x 0.031\" W (1.60mm x 0.80mm)", Supplier 1=DigiKey
R5_U_CW R5_U_WW R6_U_CW R6_U_WW R11 R12: library part CRCW080510R0JNEAC, "RES 10 OHM 5% 1/8W 0805", Device Package="0805 (2012 Metric)", manufacturer="Vishay Dale", Operating Temperature="-55°C ~ 155°C", Power (Watts)="0.125W, 1/8W", Supplier Device Package=0805, Supplier Part Number 1=541-4167-1-ND, Temperature Coefficient=±200ppm/°C, Tolerance=±5%, componentlink1description=Datasheet, componentlink1url=http://www.vishay.com/docs/28773/crcwce3.pdf, componentlink2description="DigiKey Link", componentlink2url=https://www.digikey.com/en/products/detail/vishay-dale/CRCW080510R0JNEAC/7928589, Composition="Thick Film", Height - Seated (Max)="0.024\" (0.60mm)", lastupdated="16/03/2022 06:53:04", Lifecycle Status=Active, Minimum Order=1, Number of Terminations=2, Package / Case="0805 (2012 Metric)", packaging=TapeAndReel, Part Number=CRCW080510R0JNEAC, Part Status=Active, partid=37142, price=0.01, Resistance="10 Ohms", series=CRCW-C, Size / Dimension="0.079\" L x 0.049\" W (2.00mm x 1.25mm)", Supplier 1=DigiKey
R7: library part RLP73M2BR043JTD, "RES 0.043 OHM 5% 1/2W 1206", Device Package="1206 (3216 Metric)", manufacturer="TE Connectivity Passive Product", Operating Temperature="-55°C ~ 155°C", Power (Watts)="0.5W, 1/2W", Supplier Device Package=1206, Supplier Part Number 1=A109833CT-ND, Temperature Coefficient=±400ppm/°C, Tolerance=±5%, componentlink1description=Datasheet, componentlink1url=https://www.te.com/commerce/DocumentDelivery/DDEController?Action=srchrtrv&DocNm=1773269&DocType=DS&DocLang=English, componentlink2description="DigiKey Link", componentlink2url=https://www.digikey.com/en/products/detail/te-connectivity-passive-product/RLP73M2BR043JTD/4032208, Composition="Thick Film", Features="Current Sense", Height - Seated (Max)="0.026\" (0.65mm)", lastupdated="16/03/2022 06:57:55", Lifecycle Status=Active, Minimum Order=1, Number of Terminations=2, Package / Case="1206 (3216 Metric)", packaging=TapeAndReel, Part Number=RLP73M2BR043JTD, Part Status=Active, partid=2125, price=0.10, Resistance="43 mOhms", series="RL73, CGS", Size / Dimension="0.122\" L x 0.061\" W (3.10mm x 1.55mm)", Supplier 1=DigiKey
R13 R14: library part ERJ-3EKF3240V, "RES SMD 324 OHM 1% 1/10W 0603", Device Package="0603 (1608 Metric)", manufacturer="Panasonic Electronic Components", Operating Temperature="-55°C ~ 155°C", Power (Watts)="0.1W, 1/10W", Ratings=AEC-Q200, Supplier Device Package=0603, Supplier Part Number 1=P324HCT-ND, Temperature Coefficient=±100ppm/°C, Tolerance=±1%, componentlink1description=Datasheet, componentlink1url=https://industrial.panasonic.com/cdbs/www-data/pdf/RDA0000/AOA0000C304.pdf, componentlink2description="DigiKey Link", componentlink2url=https://www.digikey.com/en/products/detail/panasonic-electronic-components/ERJ-3EKF3240V/196295, Composition="Thick Film", Features="Automotive AEC-Q200", Height - Seated (Max)="0.022\" (0.55mm)", lastupdated="21/03/2022 18:33:03", Lifecycle Status=Active, Minimum Order=1, Number of Terminations=2, Package / Case="0603 (1608 Metric)", packaging=TapeAndReel, Part Number=ERJ-3EKF3240V, Part Status=Active, partid=26113, price=0.01, Resistance="324 Ohms", series=ERJ-3EK, Size / Dimension="0.063\" L x 0.031\" W (1.60mm x 0.80mm)", Supplier 1=DigiKey
R15 R16: "SLIDE POT 100K OHM 0.125W TOP", manufacturer="Bourns Inc.", Power (Watts)="0.125W, 1/8W", Resistance="100 kOhms", Supplier Part Number 1=PTL45-15O0-104B1-ND, Tolerance=±20%, Adjustment Type=Top, componentlink1description=Datasheet, componentlink1url=https://www.bourns.com/docs/Product-Datasheets/PTL.pdf, componentlink2description="DigiKey Link", componentlink2url=https://www.digikey.com/en/products/detail/bourns-inc/PTL45-15O0-104B1/3781311, Fader Type="Standard, LED", lastupdated="21/03/2022 16:30:02", Lifecycle Status=Active, Minimum Order=1, Mounting Type="Through Hole", packaging=Bulk, Part Number=PTL45-15O0-104B1, Part Status=Active, price=1.14, series="Pro Audio PTL", Size / Dimension="Rectangular - 2.362\" L x 0.354\" W x 0.276\" H (60.00mm x 9.00mm x 7.00mm)", Supplier 1=DigiKey, Travel Range=45mm

## Free pads (board coordinates)
  round 7 hole 3.5: M1(5,10) M2(5,85) M3(95,90) M4(95,5)

## Via types
v1: diameter 0.8, hole 0.4, Top Layer to Bottom Layer, tented both sides, 137 vias
v2: diameter 0.5, hole 0.2, Top Layer to Bottom Layer, tented both sides, 9 vias
v3: diameter 0.4, hole 0.2, Top Layer to Bottom Layer, tented both sides, 1 vias

## Nets (pads, with @x,y where several pads share a name; then routed paths per layer and width w, separated by ;. In a path a pad name is that pad's centre, name@x,y a point inside that pad or via, vN(x,y) a via of type N, cw(c..) or ccw(c..) an arc to the next point about the centre after c; other vN are vias at no path point)
3V3: C21.2 FB1.1 FB2.1 IC6.3 J1.1 J2.1 R4_U_CW.2 R4_U_WW.2 R10.2 R15.1 R16.1 | length 227.7
  Top Layer w0.25: v1(27.5,26.5) J1.1 ; v1(51,74.25) 54.35,74.25 R10.2 ; v1(52,27) 54.4,27 R4_U_CW.2 ; v1(52.5,50.6) 54.45,50.6 R4_U_WW.2
  Top Layer w0.4: IC6.3@27.3,70.9 27.1,70.9 21.75,65.55 21.75,48.25 28,42 32,42 ; IC6.3 29.9,71.05 C21.2 30,71.05 v1(30,72.25) ; FB2.1 32.531,40.924 32.531,41.469 32,42 ; FB1.1 v1@38.8,36.44 ; v1@38.84,36.44 39.4,37 39.4,42.1 v1(38.5,43) 33,43 32,42
  Bottom Layer w0.25: v1(30,72.25) 32,74.25 v1(51,74.25) ; v1(38.5,43) 38.5,48.3 40.8,50.6 v1(52.5,50.6) ; R16.1 42.75,2.946 42.599,2.795 14.205,2.795 12.75,4.25 R15.1 12.75,17.45 21.8,26.5 v1(27.5,26.5) 27.5,21.379 29.604,19.275 36.691,19.275 37.593,20.177 37.593,20.823 36.166,22.25 35.33,22.25 J2.1 35.08,32.68 v1(38.8,36.4) 40.7,36.4 50.1,27 v1(52,27)
3V3MCU: C13.2 C14.2 FB1.2 IC5.19 | length 7.5
  Top Layer w0.25: IC5.19 33.415,37.665 33.75,38 35,38 35.665,38.665 C14.2 C13.2 FB1.2
15V: C17.1 C18.1 C19.1 D1_U_CW.2 D1_U_WW.2 D3.2 IC1_U_CW.6 IC1_U_WW.6 IC3.6 J4.M J5.M J6.M L3.2 R1_U_CW.2 R1_U_WW.2 R7.2 | length 44.6
  Top Layer w0.3: IC1_U_CW.6 55.635,27.635 57,29 64.45,29 D1_U_CW.2 ; IC1_U_WW.6 55.635,51.385 57,52.75 64.45,52.75 D1_U_WW.2
  Top Layer w0.4: IC3.6 55.635,75.885 58.2,78.45 D3.2
BRIGHTNESS: C22.2 IC5.23 R15.2 TP3.1 | length 52.8
  Top Layer w0.25: 30.783,37.777 30.818,37.777 31.411,37.184 31.411,36.744 IC5.23
  Top Layer w0.3: C22.2 8.175,4.5 R15.2 10.25,26.05 21.995,37.795 30.765,37.795 30.783,37.777